# Altium PCB PWMController.PcbDoc
Units mil, origin at the board's own origin, x right, y up, seen from the top; angles counter-clockwise.
Board outline 2895 x 1675 mil, 2 copper layers (Top Layer, Bottom Layer); 14 components, 11 nets, 41 pads, 1 vias.
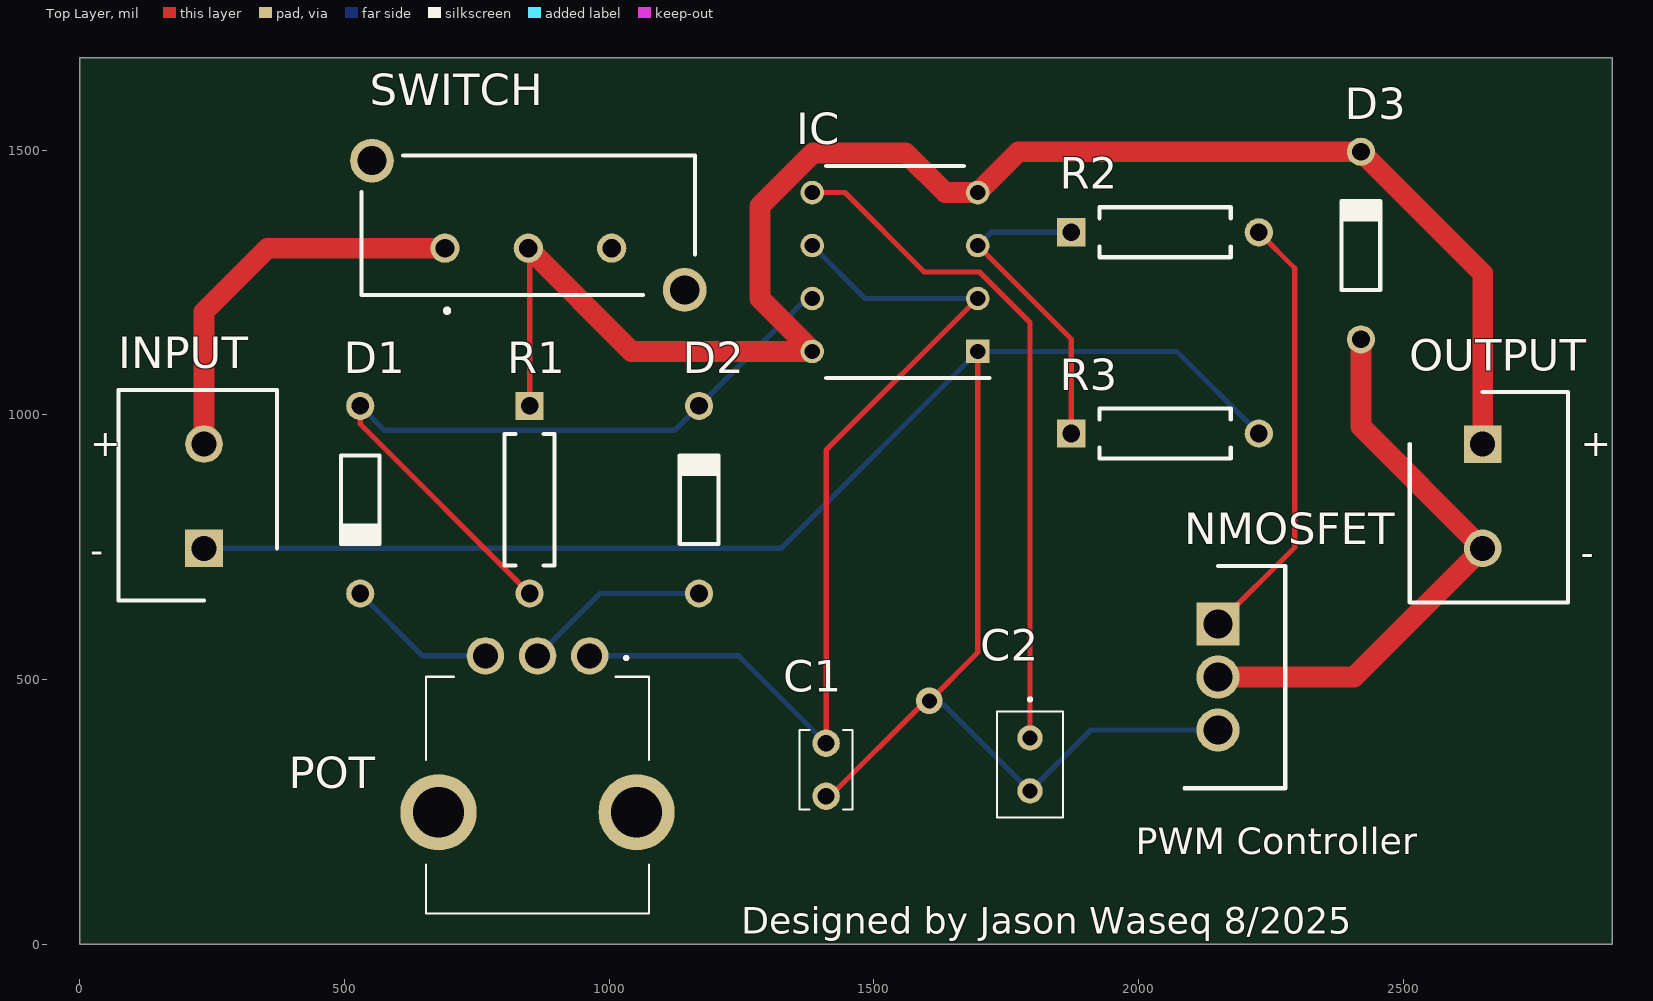
[diagram p0: Top Layer view]
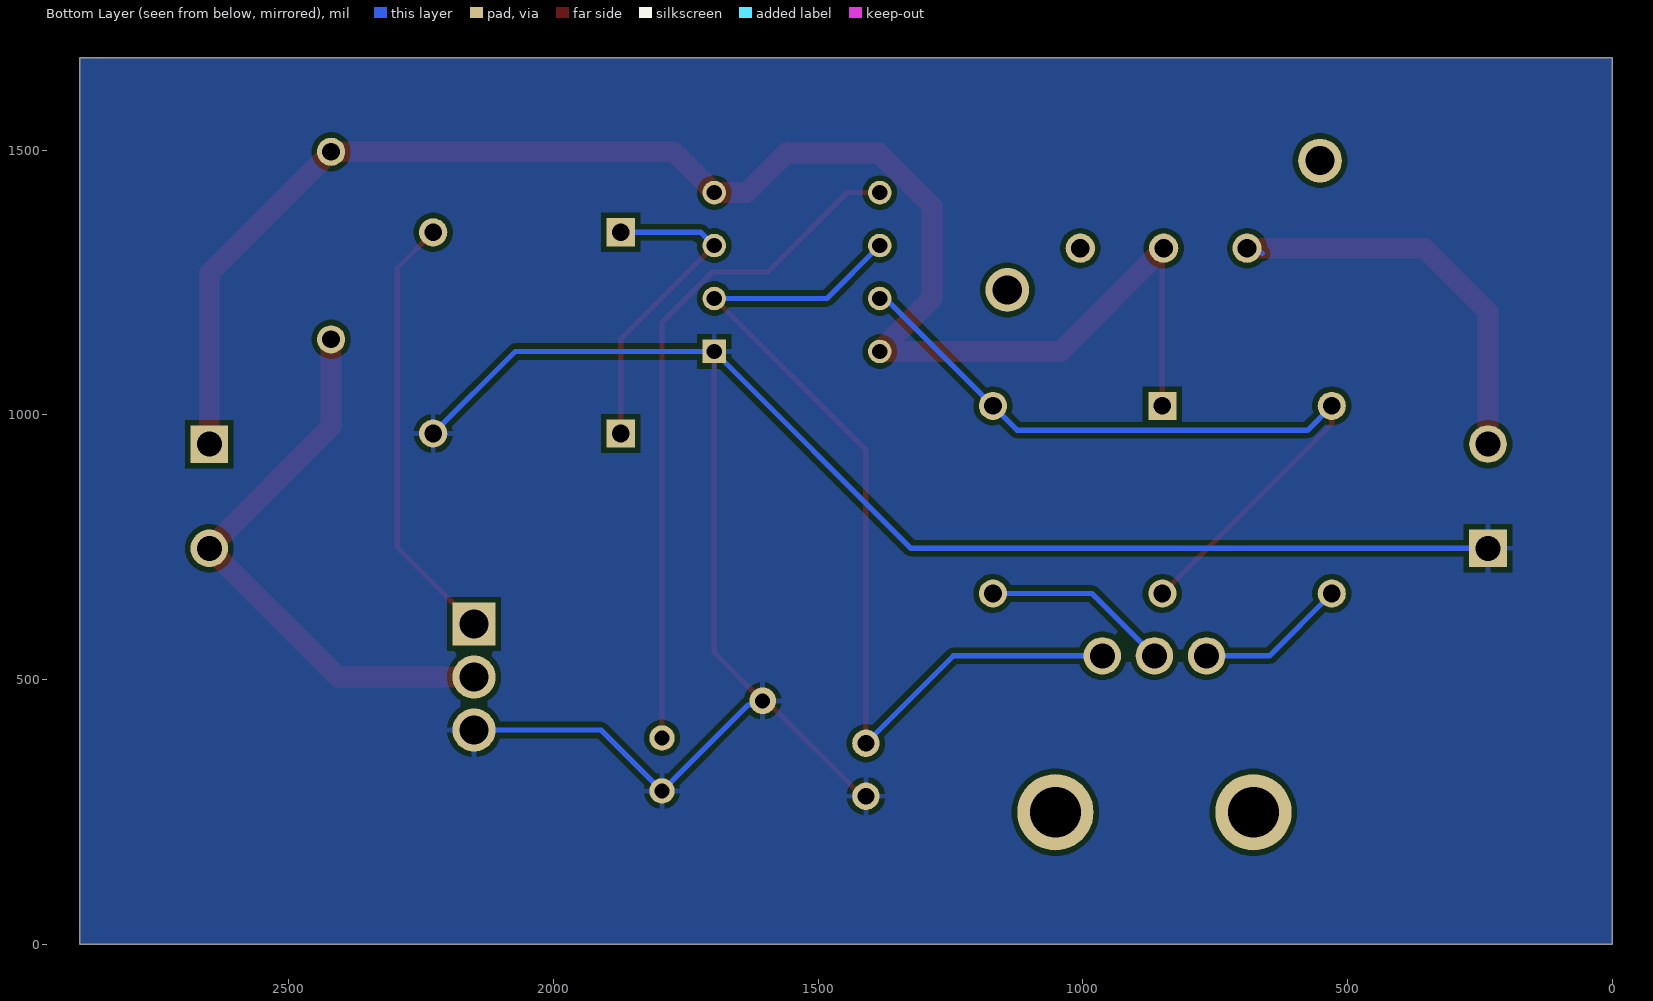
[diagram p1: Bottom Layer view, seen from below]
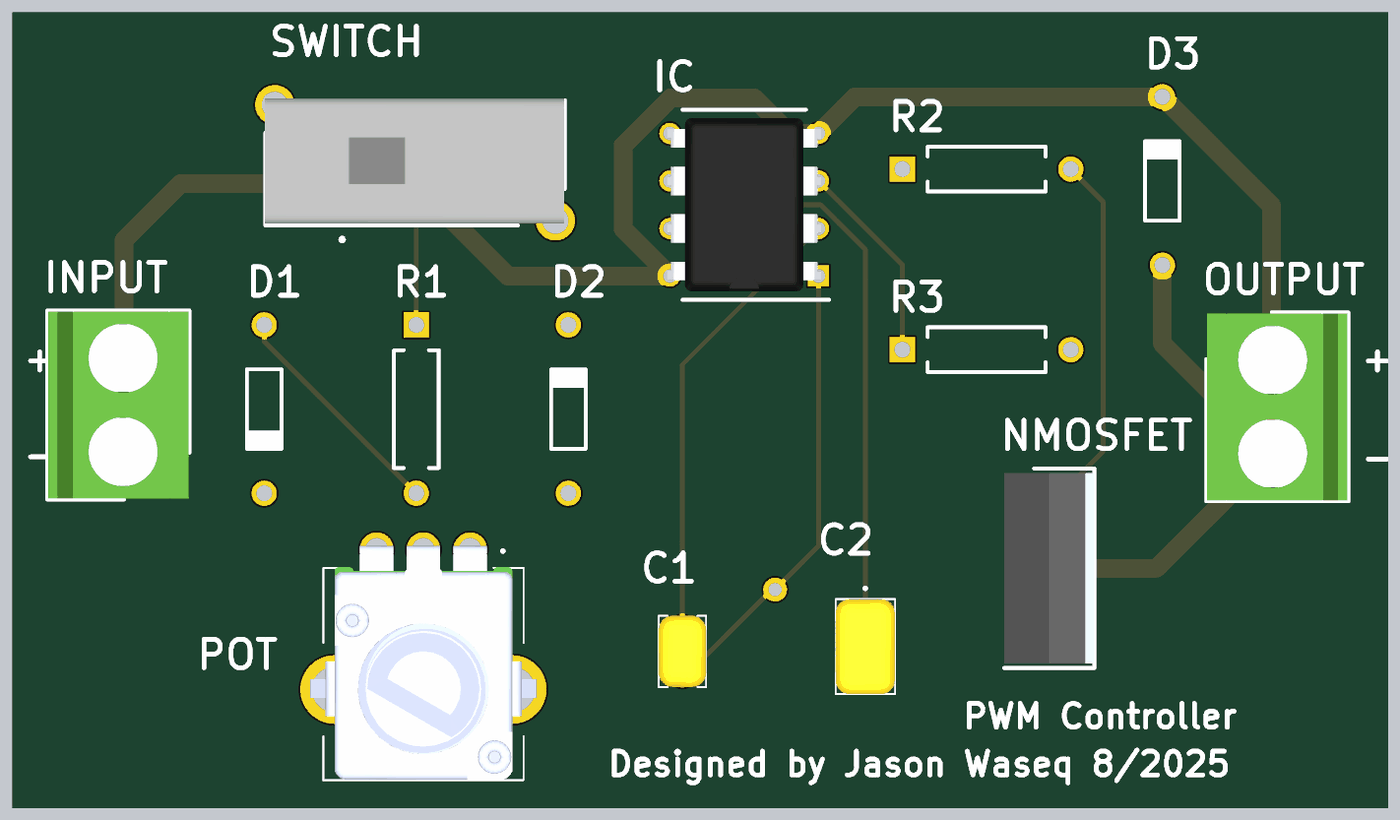
[diagram p2: 3D render of the assembled board from above, using the file's embedded part models]

## Layer stack, top to bottom
Top Solder: solder mask 0.4, Solder Resist, Dk 3.5
Top Layer: signal copper 1.4
Dielectric 1: dielectric 12.6, FR-4, Dk 4.8
Bottom Layer: signal copper 1.4
Bottom Solder: solder mask 0.4, Solder Resist, Dk 3.5

## Board outline
0,0 0,1675 2895,1675 2895,0

## Design rules (kind name [scope] priority, off if disabled: settings)
Clearance [All] p1: gap=10 ignorepadtopadclearanceinfootprint=FALSE
Height [All] p1: minheight=0 maxheight=2000 prefheight=500
PolygonConnect [All] p1: connectstyle=Relief reliefconductorwidth=10 reliefentries=4 polygonreliefangle="90 Angle" airgapwidth=10
RoutingVias [All] p1: holewidth=28 width=50 viastyle="Through Hole" minholewidth=28 minwidth=50 maxholewidth=28 maxwidth=50
SolderMaskExpansion [All] p1: expansion=4 istentingtop=FALSE
SupplyNets "Schematic Supply Nets_1" [InNet('+12v')] p1: voltage=0.000
SupplyNets "Schematic Supply Nets" [InNet('GND')] p2: voltage=0.000
Width [All] p1: maxlimit=39.37 minlimit=10 preferedwidth=10 minimp=50.000000 maximp=50.000000 favimp=50.000000
29 further rules are at their usual default settings.

## Components (designator, comment, footprint, x,y, rotation, side; value= is the part's Value field where it differs from the comment)
C1 "C315C103K1R5TA" C315C103K1R5TA 1410,380 r270 top
C2 "C320C104K5R5TA" C320C104K5R5TA 1795,390 r270 top
D1 "1N4148" NXP-SOD27-2_V 530,840 r270 top
D2 "1N4148" NXP-SOD27-2_V 1170,840 r90 top
D3 "1N4148" NXP-SOD27-2_V 2420,1320 r90 top
IC "NE555P" DIP794W53P254L959H508Q8N 1540,1270 r180 top
INPUT "691137710002" SHDR2W70P0X500_1X2_1000X750X1160P 235,748.15 r90 top
NMOSFET "IRF3205PBF" TO254P483X1016X1994-3P 2150,605 r270 top
OUTPUT "691137710002" SHDR2W70P0X500_1X2_1000X750X1160P 2650,945 r270 top
POT "P0915N-FC15BR100K" P0915NFC15BR100K 963.43,545 r180 top
R1 "MFR-25FBF52-1K" RESA60-630X240 850,840 r270 top value=1k
R2 "MFR-25FBF52-1K" RESA60-630X240 2050,1345 r0 top value=1k
R3 "MFR-25FBF52-1K" RESA60-630X240 2050,965 r0 top value=1k
SWITCH "1825255-1" 18252551 690.04,1315 r180 top

## Footprints (in the part's own frame and the unit in brackets; to place one, negate y for a bottom-side part, rotate by r counter-clockwise, add the part's x,y. Pads: shape width x height; smd on the part's side, far side on the other; paste and mask are expansions set on the pad)
18252551 [mm]
  round 1.4 hole 0.9: 1(0,0) 2(-4,0) 3(-8,0)
  round 2.1 hole 1.4: MH1(3.5,-4.2) MH2(-11.5,2)
  silkscreen extent -12,-4.45 4,3.1, body extent -11.96,-4.55 4.04,2.15, height 12.41
C315C103K1R5TA [mm]
  round 1.316 hole 0.81: 1(0,0) 2(2.54,0)
  silkscreen extent -0.64,-1.27 3.18,1.27, body extent -0.64,-1.28 3.17,1.27, height 4.66
C320C104K5R5TA [mm]
  round 1.217 hole 0.71: 1(0,0) 2(2.54,0)
  silkscreen extent -1.9,-1.59 3.81,1.59, body extent -1.27,-1.6 3.81,1.59, height 7.36
DIP794W53P254L959H508Q8N [mm]
  rect 1.13x1.13 hole 0.73: 1(-3.97,3.81)
  round 1.13 hole 0.73: 2(-3.97,1.27) 3(-3.97,-1.27) 4(-3.97,-3.81) 5(3.97,-3.81) 6(3.97,-1.27) 7(3.97,1.27) 8(3.97,3.81)
  silkscreen extent -4.54,-5.08 3.3,5.08, body extent -4.1,-4.64 4.1,4.64, height 4.21
NXP-SOD27-2_V [mm] "SOD27, 2-Leads, Dia 1.85mm, Body Length 4.25mm, Pin Spacing 9mm"
  round 1.35 hole 0.85: 1(-4.5,0) 2(4.5,0)
  silkscreen extent -2.13,-0.93 2.13,0.93, body extent -4.78,-0.93 4.78,0.92, height 1.85
P0915NFC15BR100K [mm]
  round 3.66 hole 2.44: MH1(-2.25,7.5) MH2(7.25,7.5)
  round 1.8 hole 1.2: R11(0,0) R12(2.5,0) R13(5,0)
  silkscreen extent -2.85,0.05 7.85,12.35, body extent -3.55,-0.19 8.55,12.31, height 26.54
RESA60-630X240 [mm] "Axial Resistor, 2-Leads, Dia 2.4mm, Body Length 6.3mm"
  rect 1.35x1.35 hole 0.85: 1(-4.5,0)
  round 1.35 hole 0.85: 2(4.5,0)
  silkscreen extent -3.15,-1.2 3.15,1.2, body extent -4.77,-1.19 4.77,1.2, height 2.4
SHDR2W70P0X500_1X2_1000X750X1160P [mm]
  rect 1.8x1.8 hole 1.2: 1(0,0)
  round 1.8 hole 1.2: 2(5,0)
  silkscreen extent -2.5,-3.5 7.6,4.1, body extent -2.45,-3.45 7.55,4.05, height 11.5
TO254P483X1016X1994-3P [mm]
  rect 2.07x2.07 hole 1.38: 1(0,0)
  round 2.07 hole 1.38: 2(2.54,0) 3(5.08,0)
  silkscreen extent -2.8,-1.6 7.88,3.22, body extent -2.54,-1.61 7.62,3.22, height 18.86

## Part data
C1: "Capacitor", Manufacturer_Name=KEMET, Mouser Part Number=80-C315C103K1R, Arrow Part Number=C315C103K1R5TA, Arrow Price/Stock=https://www.arrow.com/en/products/c315c103k1r5ta/kemet-corporation?region=nac, Datasheet Link=https://content.kemet.com/datasheets/KEM_C1050_GOLDMAX_X7R.pdf, Height=5.33mm, Manufacturer_Part_Number=C315C103K1R5TA, Mouser Price/Stock=https://www.mouser.co.uk/ProductDetail/KEMET/C315C103K1R5TA?qs=owscpGBW86WnCk7Nx2fiWQ%3D%3D
C2: "Capacitor", Manufacturer_Name=KEMET, Mouser Part Number=80-C320C104K5R, Arrow Part Number=C320C104K5R5TA, Arrow Price/Stock=https://www.arrow.com/en/products/c320c104k5r5ta/kemet-corporation?utm_currency=USD&region=nac, Datasheet Link=https://content.kemet.com/datasheets/KEM_C1050_GOLDMAX_X7R.pdf, Height=5.84mm, Manufacturer_Part_Number=C320C104K5R5TA, Mouser Price/Stock=https://www.mouser.co.uk/ProductDetail/KEMET/C320C104K5R5TA?qs=PmkNt%2FFLxQc4kNUCHU6a6Q%3D%3D
D1 D2 D3: library part CMP-004-00000-2, "High Speed Diode, 100 V, 0.45 A, -65 to 175 degC, 2-Pin SOD27, RoHS, Bulk", Case/Package=DO, Forward Current=300mA, Forward Voltage=1V, Manufacturer=Fairchild, Max Operating Temperature=175°C, Max Surge Current=4A, Min Operating Temperature=-65°C, Package Quantity=2000, Package Reference=SOD27, Peak Reverse Current=5uA, Power=500mW, Datasheet URL=http://www.nxp.com/documents/data_sheet/1N4148_1N4448.pdf, Datasheet Version=Aug-04, Diameter=1.91mm, Elements=1, Manufacturer URL=https://www.fairchildsemi.com/, Package URL=http://www.nxp.com/documents/data_sheet/1N4148_1N4448.pdf, Packaging=Bulk, Pins=2, Recovery Time=4ns, RoHS Compliant=True
IC: "Integrated Circuit", Manufacturer_Name="Texas Instruments", Mouser Part Number=595-NE555P, Arrow Part Number=NE555P, Arrow Price/Stock=https://www.arrow.com/en/products/ne555p/texas-instruments?utm_currency=USD&region=europe, Datasheet Link=http://www.ti.com/lit/ds/symlink/ne555.pdf, Height=5.08mm, Manufacturer_Part_Number=NE555P, Mouser Price/Stock=https://www.mouser.co.uk/ProductDetail/Texas-Instruments/NE555P?qs=rkhjVJ6%2F3EIf4CWgjIKuKQ%3D%3D
INPUT OUTPUT: "Connector", Manufacturer_Name="Wurth Elektronik", Mouser Part Number=710-691137710002, Datasheet Link=https://katalog.we-online.com/em/datasheet/691137710002.pdf, Height=11.6mm, Manufacturer_Part_Number=691137710002, Mouser Price/Stock=https://www.mouser.co.uk/ProductDetail/Wurth-Elektronik/691137710002?qs=lBTPRtX1sU9LnHBbviNKGA%3D%3D
NMOSFET: "MOSFET (N-Channel)", Manufacturer_Name=Infineon, Mouser Part Number=942-IRF3205PBF, Arrow Part Number=IRF3205PBF, Arrow Price/Stock=https://www.arrow.com/en/products/irf3205pbf/infineon-technologies-ag?utm_currency=USD&region=europe, Datasheet Link=https://componentsearchengine.com/Datasheets/2/IRF3205PBF.pdf, Height=4.83mm, Manufacturer_Part_Number=IRF3205PBF, Mouser Price/Stock=https://www.mouser.co.uk/ProductDetail/Infineon-Technologies/IRF3205PBF?qs=2r01AXMCG3Ng8ivZ6KPoqw%3D%3D
POT: "Variable Resistor", Manufacturer_Name="TT Electronics", Mouser Part Number=858-P0915NFC15BR100K, Arrow Part Number=P0915N-FC15BR100K, Arrow Price/Stock=null?region=nac, Datasheet Link=https://www.digikey.ph/en/products/detail/tt-electronics-bi/P0915N-FC15BR100K/5957453, Height=26mm, Manufacturer_Part_Number=P0915N-FC15BR100K, Mouser Price/Stock=https://www.mouser.co.uk/ProductDetail/BI-Technologies-TT-Electronics/P0915N-FC15BR100K?qs=56eeD6vBg8hdp2JeLzjkVQ%3D%3D
R1 R2 R3: library part CMP-009-00048-4, "Axial Resistor, 1 KOhm, +/- 1%, 250 mW, -55 to 155 degC, 2-Pin THD, RoHS, Bulk", Case/Package=Axial, Manufacturer=Yageo, Max Operating Temperature=155°C, Min Operating Temperature=-55°C, Package Description="2-Pin Axial Lead, Dia 2.4 mm, Body Length 6.3 mm", Package Quantity=200, Package Reference=MFR-25, Power=250mW, Tolerance=1%, Voltage Rating=250V, Composition=CarbonFilm, Datasheet URL=http://www.yageo.com/documents/recent/Yageo%20LR_MFR_2013.pdf, Datasheet Version=Apr-13, Manufacturer URL=http://www.yageo.com/, Mounting Technology=TH, Packaging=Bulk, RoHS Compliant=True
SWITCH: "Switch", Manufacturer_Name="TE Connectivity", Arrow Part Number=1825255-1, Arrow Price/Stock=https://www.arrow.com/en/products/1825255-1/te-connectivity?utm_currency=USD&region=nac, Datasheet Link=https://www.te.com/commerce/DocumentDelivery/DDEController?Action=srchrtrv&DocNm=1308111-1_SWITCHES_CORE_PROGRAM_CATALOG&DocType=Catalog%20Section&DocLang=English&PartCntxt=1825255-1&DocFormat=pdf, Height=12.3mm, Manufacturer_Part_Number=1825255-1

## Via types
v1: diameter 50, hole 28, Top Layer to Bottom Layer, 1 vias

## Nets (pads, with @x,y where several pads share a name; then routed paths per layer and width w, separated by ;. In a path a pad name is that pad's centre, name@x,y a point inside that pad or via, vN(x,y) a via of type N, cw(c..) or ccw(c..) an arc to the next point about the centre after c; other vN are vias at no path point)
+12v: D3.2 IC.4 IC.8 OUTPUT.1 R1.1 SWITCH.2 | length 3150.9
  Top Layer w10: SWITCH.2@825,1315 850,1290 R1.1
  Top Layer w39.37: SWITCH.2 1042.52,1120 IC.8 ; IC.8@1385.09,1120 1285,1220.09 1285,1394.74 1385.26,1495 1560,1495 1635,1420 IC.4 1773.47,1497.17 D3.2 2650,1267.17 OUTPUT.1
  Bottom Layer w10: SWITCH.2@825,1315 SWITCH.2
GND: C1.2 C2.2 IC.1 INPUT.1 NMOSFET.3 R3.2 | length 3840.8
  Top Layer w10: C1.2 1417.5,280 1597.5,460 v1(1605,460) 1696.3,551.3 IC.1
  Bottom Layer w10: INPUT.1 1324.45,748.15 IC.1 2072.17,1120 R3.2 ; v1(1605,460) 1612.65,452.35 1632.65,452.35 C2.2 1910,405 NMOSFET.3
NetC1_1: C1.1 IC.2 IC.6 POT.R11 | length 1827.5
  Top Layer w10: C1.1 1410,933.7 IC.2
  Bottom Layer w10: POT.R11 1245,545 C1.1 ; IC.6 1483.7,1220 IC.2
NetC2_1: C2.1 IC.5 | length 1297.8
  Top Layer w10: IC.5 1445.35,1420 1595.35,1270 1700,1270 1795,1175 C2.1
NetD1_1: D1.1 D2.2 IC.7 R1.2 | length 1462.8
  Top Layer w10: D1.1 530,982.83 R1.2
  Bottom Layer w10: D1.1 576.17,971 1123.83,971 1366.24,1213.4 1377.1,1213.4 IC.7
NetD1_2: D1.2 POT.R13 | length 285.4
  Bottom Layer w10: D1.2 647.83,545 POT.R13
NetD2_1: D2.1 POT.R12 | length 353.8
  Bottom Layer w10: POT.R12 982.83,662.83 D2.1
NetD3_1: D3.1 NMOSFET.2 OUTPUT.2 | length 1090.7
  Top Layer w39.37: NMOSFET.2 2406.85,505 OUTPUT.2 2420,978.15 D3.1
NetIC_3: IC.3 R2.1 R3.1 | length 615
  Top Layer w10: IC.3 1872.83,1143.47 R3.1
  Bottom Layer w10: IC.3 1721.3,1345 R2.1
NetINPUT_2: INPUT.2 SWITCH.1 | length 787.3
  Top Layer w39.37: INPUT.2 235,1195 355,1315 SWITCH.1
  Bottom Layer w10: 661.62,1305 662.99,1306.37 681.41,1306.37 SWITCH.1
NetNMOSFET_1: NMOSFET.1 R2.2 | length 828.2
  Top Layer w10: NMOSFET.1 2295,750 2295,1277.17 R2.2
pads on no net: POT.MH1 POT.MH2 SWITCH.3 SWITCH.MH1 SWITCH.MH2

## Polygon pours and split planes (outlines as drawn)
GND on Bottom Layer "GND_L02_P001" (solid, pour order 1): 0,1675 2895,1675 2895,0 0,0

## Silkscreen, mask and mechanical layers (free items; w line width, h text height)
Top Overlay:
  text "+" at 20,921.67 h50
  text "+" at 2835,921.67 h50
  text "-" at 20,720.01 h50
  text "-" at 2835,715.01 h50
  text "PWM Controller" at 1995,170 h50
  text "Designed by Jason Waseq 8/2025" at 1250,20 h50
Mechanical 1:
  the board outline again, w10